# EAGLE board FPD EMC01 (EAGLE 6.6.0)

Size 160 x 100 mm. Coordinates in mm from the lower left corner, seen from the top.
Outline: 0,0 160,0 160,100 0,100 0,0
Copper layers (1*16): Top 0.035mm / dielectric 1.5mm / Bottom 0.035mm
Design rules "default": minimum track width 10mil, minimum drill 24mil, track to track 8mil, track to pad 8mil, pad to pad 8mil, via to via 8mil, smd to smd 8mil, copper to edge 40mil, drill to drill 8mil, minimum pad ring 10mil, minimum via ring 8mil, stop-mask expansion 4mil, vias tented up to drill 0mil, thermal gap 10mil

## Footprints (pad centres in the part's own frame; a part is rotated, then mirrored left to right if it is on the bottom)
CAPC2012X145AN = smd 1.15 x 1.45: 1 -0.9,0; 2 0.9,0
C805 = smd 1.3 x 1.5: 1 -0.95,0; 2 0.95,0
PANASONIC_D = smd 3 x 1.4: + 2.4,0; - -2.4,0
SMA = smd 2 x 2: A 2,0; C -2,0
MINISMDC = smd 1.676 x 3.15: P$1 -2.286,0; P$2 2.489,0
PHOENIX-5MM-2POS = drill 1.4 long: P$1 -2.5,0; P$2 2.5,0
USB-MICROB-PTH = smd 0.4 x 1.35: D+ 0,1.905; D- -0.65,1.905; GND 1.3,1.905; ID 0.65,1.905; VBUS -1.3,1.905 | drill 0.5 pad 0.6: GND1 -3.5,-0.795; GND3 3.5,-0.795 | smd 7.89 x 1.55: GND2 0,-0.795 | drill 0.55 pad 0.95 offset: GND4 -2.5,1.905; GND5 2.5,1.905
5566-6 = drill 1.4 square: 1 4.2,-2.75; 2 0,-2.75; 3 -4.2,-2.75; 4 4.2,2.75; 5 0,2.75; 6 -4.2,2.75
JST_B4B-PH_HEADER = drill 0.8 long: P1 2.98,0.048; P2 0.98,0.048; P3 -1.02,0.048; P4 -3.02,0.048
2X13SMD = smd 1.016 x 3.302: 1 -1.27,-3.81; 2 -1.27,1.27; 3 1.27,-3.81; 4 1.27,1.27; 5 3.81,-3.81; 6 3.81,1.27; 7 6.35,-3.81; 8 6.35,1.27; 9 8.89,-3.81; 10 8.89,1.27; 11 11.43,-3.81; 12 11.43,1.27; 13 13.97,-3.81; 14 13.97,1.27; 15 16.51,-3.81; 16 16.51,1.27; 17 19.05,-3.81; 18 19.05,1.27; 19 21.59,-3.81; 20 21.59,1.27; 21 24.13,-3.81; 22 24.13,1.27; 23 26.67,-3.81; 24 26.67,1.27; 25 29.21,-3.81; 26 29.21,1.27
JP3Q = drill 0.914 octagon: 1 -2.54,-1.27; 2 -2.54,1.27; 3 0,-1.27; 4 0,1.27; 5 2.54,-1.27; 6 2.54,1.27
1X02SMD = smd 1.016 x 3.302: 1 -1.27,1.27; 2 1.27,-1.27
MOLEX-1X4 = drill 1.016 pad 1.88 square: 1 0,0 | drill 1.016 pad 1.88: 2 2.54,0; 3 5.08,0; 4 7.62,0
JST_B3B-PH_HEADER = drill 0.8 long: P1 2.027,0.048; P2 0.028,0.048; P3 -1.972,0.048
1X02 = drill 1.016 pad 1.88: 1 0,0; 2 2.54,0
SDR1006 = smd 10.008 x 3.607: P$1 0,3.048; P$2 0,-3.353
CHIP-LED0805 = smd 1.2 x 1.2: A 0,-1.05; C 0,1.05
SJ_3_CONNECTED = smd 0.635 x 1.27: 1 -0.889,0; 2 0,0; 3 0.889,0
TO220V = drill 1.016 long: 1 -2.54,0; 2 0,0; 3 2.54,0
SOT95P280X135-3N = smd 1.4 x 0.65: 1 -1.15,0.95; 2 -1.15,-0.95; 3 1.15,0
CTS406 = smd 1.9 x 1.4: 1 -2.2,-1.2; 2 2.2,-1.2; 3 2.2,1.2; 4 -2.2,1.2
R0805 = smd 1.1 x 1.4: 1 -1,0; 2 1,0
SJ = smd 1.168 x 1.6: 1 -0.762,0; 2 0.762,0
EVQ-Q2 = smd 3.2 x 1.2: A -3.4,-2; A' 3.4,-2; B -3.4,2; B' 3.4,2
TSOT6 = smd 0.69 x 1: 1 -1,-1.4; 2 -0.05,-1.4; 3 0.9,-1.4; 4 0.9,1.2; 5 -0.05,1.2; 6 -1,1.2
TSSOP-24 = smd 0.45 x 1.65: 1 -3.6,-3.1; 2 -2.95,-3.1; 3 -2.3,-3.1; 4 -1.65,-3.1; 5 -1,-3.1; 6 -0.35,-3.1; 7 0.3,-3.1; 8 0.95,-3.1; 9 1.6,-3.1; 10 2.25,-3.1; 11 2.9,-3.1; 12 3.55,-3.1; 13 3.55,3; 14 2.9,3; 15 2.25,3; 16 1.6,3; 17 0.95,3; 18 0.3,3; 19 -0.35,3; 20 -1,3; 21 -1.65,3; 22 -2.3,3; 23 -2.95,3; 24 -3.6,3 | smd 4.32 x 3: PAD -0.025,-0.05
SOT23-6 = smd 0.6 x 0.9: 1 -0.95,-1.15; 2 0,-1.15; 3 0.95,-1.15; 4 0.95,1.15; 5 0,1.15; 6 -0.95,1.15
SOT23C = smd 1 x 1.4: 1 -0.95,-1.1; 2 0.95,-1.1; 3 0,1.1
TSSOP14 = smd 0.35 x 1.6: 1 -2,-2.9; 2 -1.35,-2.9; 3 -0.7,-2.9; 4 -0.05,-2.9; 5 0.6,-2.9; 6 1.25,-2.9; 7 1.9,-2.9; 8 1.9,2.7; 9 1.25,2.7; 10 0.6,2.7; 11 -0.05,2.7; 12 -0.7,2.7; 13 -1.35,2.7; 14 -2,2.7
QFP80P1600X1600X120-64N = smd 1.473 x 0.508: 1 -7.62,5.994; 2 -7.62,5.207; 3 -7.62,4.394; 4 -7.62,3.607; 5 -7.62,2.794; 6 -7.62,2.007; 7 -7.62,1.194; 8 -7.62,0.406; 9 -7.62,-0.406; 10 -7.62,-1.194; 11 -7.62,-2.007; 12 -7.62,-2.794; 13 -7.62,-3.607; 14 -7.62,-4.394; 15 -7.62,-5.207; 16 -7.62,-5.994; 33 7.62,-5.994; 34 7.62,-5.207; 35 7.62,-4.394; 36 7.62,-3.607; 37 7.62,-2.794; 38 7.62,-2.007; 39 7.62,-1.194; 40 7.62,-0.406; 41 7.62,0.406; 42 7.62,1.194; 43 7.62,2.007; 44 7.62,2.794; 45 7.62,3.607; 46 7.62,4.394; 47 7.62,5.207; 48 7.62,5.994 | smd 0.508 x 1.473: 17 -5.994,-7.62; 18 -5.207,-7.62; 19 -4.394,-7.62; 20 -3.607,-7.62; 21 -2.794,-7.62; 22 -2.007,-7.62; 23 -1.194,-7.62; 24 -0.406,-7.62; 25 0.406,-7.62; 26 1.194,-7.62; 27 2.007,-7.62; 28 2.794,-7.62; 29 3.607,-7.62; 30 4.394,-7.62; 31 5.207,-7.62; 32 5.994,-7.62; 49 5.994,7.62; 50 5.207,7.62; 51 4.394,7.62; 52 3.607,7.62; 53 2.794,7.62; 54 2.007,7.62; 55 1.194,7.62; 56 0.406,7.62; 57 -0.406,7.62; 58 -1.194,7.62; 59 -2.007,7.62; 60 -2.794,7.62; 61 -3.607,7.62; 62 -4.394,7.62; 63 -5.207,7.62; 64 -5.994,7.62
MSOP10 = smd 0.3 x 1.4: 1 -1,-2.2; 2 -0.5,-2.2; 3 0,-2.2; 4 0.5,-2.2; 5 1,-2.2; 6 1,2.2; 7 0.5,2.2; 8 0,2.2; 9 -0.5,2.2; 10 -1,2.2
FH12-15S-0.5SH = smd 0.3 x 1.3: 1 -3.5,3.25; 2 -3,3.25; 3 -2.5,3.25; 4 -2,3.25; 5 -1.5,3.25; 6 -1,3.25; 7 -0.5,3.25; 8 0,3.25; 9 0.5,3.25; 10 1,3.25; 11 1.5,3.25; 12 2,3.25; 13 2.5,3.25; 14 3,3.25; 15 3.5,3.25

## Placement (x,y rotation side)
C1  22uF  [CAPC2012X145AN]  -30.48,81.28 0 top  (outside the outline)
C2  0.22uF  [CAPC2012X145AN]  -57.15,67.31 0 top  (outside the outline)
C3  [C805]  -102.87,-3.81 0 top  (outside the outline)
C4  0.1uF  [CAPC2012X145AN]  -93.98,67.31 0 top  (outside the outline)
C5  0.1uF  [CAPC2012X145AN]  -17.78,74.93 0 top  (outside the outline)
C6  100uF  [PANASONIC_D]  -58.42,60.96 0 top  (outside the outline)
C7  100uF  [PANASONIC_D]  -67.31,60.96 0 top  (outside the outline)
C8  0.22uF  [CAPC2012X145AN]  -64.77,67.31 0 top  (outside the outline)
C9  10uF  [CAPC2012X145AN]  -36.83,81.28 0 top  (outside the outline)
C10  10uF  [CAPC2012X145AN]  -43.18,81.28 0 top  (outside the outline)
C11  [C805]  -102.87,-7.62 0 top  (outside the outline)
C12  1uF  [CAPC2012X145AN]  -41.91,93.98 0 top  (outside the outline)
C13  [C805]  -102.87,-11.43 0 top  (outside the outline)
C14  [C805]  -102.87,-15.24 0 top  (outside the outline)
C15  10uF  [CAPC2012X145AN]  -49.53,81.28 0 top  (outside the outline)
C16  100uF  [PANASONIC_D]  -76.2,60.96 0 top  (outside the outline)
C17  0.1uF  [CAPC2012X145AN]  -24.13,74.93 0 top  (outside the outline)
C18  100uF  [PANASONIC_D]  -85.09,60.96 0 top  (outside the outline)
C19  0.22uF  [CAPC2012X145AN]  -72.39,67.31 0 top  (outside the outline)
C20  10uF  [CAPC2012X145AN]  -55.88,81.28 0 top  (outside the outline)
C21  0.1uF  [CAPC2012X145AN]  -30.48,74.93 0 top  (outside the outline)
C22  0.1uF  [CAPC2012X145AN]  -36.83,74.93 0 top  (outside the outline)
C24  0.22uF  [CAPC2012X145AN]  -80.01,67.31 0 top  (outside the outline)
C25  10uF  [CAPC2012X145AN]  -62.23,81.28 0 top  (outside the outline)
C26  0.1uF  [CAPC2012X145AN]  -43.18,74.93 0 top  (outside the outline)
C28  0.1uF  [CAPC2012X145AN]  -55.88,74.93 0 top  (outside the outline)
C32  10uF  [CAPC2012X145AN]  -74.93,81.28 0 top  (outside the outline)
C33  0.1uF  [CAPC2012X145AN]  -68.58,74.93 0 top  (outside the outline)
C34  [C805]  -102.87,-19.05 0 top  (outside the outline)
C35  0.1uF  [CAPC2012X145AN]  -74.93,74.93 0 top  (outside the outline)
C36  [C805]  -102.87,-22.86 0 top  (outside the outline)
C38  0.1uF  [CAPC2012X145AN]  -87.63,74.93 0 top  (outside the outline)
C39  0.1uF  [CAPC2012X145AN]  -93.98,74.93 0 top  (outside the outline)
C40  0.1uF  [CAPC2012X145AN]  -17.78,81.28 0 top  (outside the outline)
C42  [C805]  -102.87,-26.67 0 top  (outside the outline)
C43  0.1uF  [CAPC2012X145AN]  -123.19,-58.42 0 top  (outside the outline)
C44  1UF  [C805]  -123.19,-64.77 0 top  (outside the outline)
C45  100NF  [C805]  -123.19,-68.58 0 top  (outside the outline)
D1  [SMA]  -40.64,67.31 0 top  (outside the outline)
D2  [SMA]  -48.26,67.31 0 top  (outside the outline)
F1  [MINISMDC]  -26.67,67.31 0 top  (outside the outline)
J2  [PHOENIX-5MM-2POS]  -82.55,40.64 0 top  (outside the outline)
J3  USB-MICRO-PTH  [USB-MICROB-PTH]  -118.11,-41.91 0 top  (outside the outline)
J4  PCIE  [5566-6]  -54.61,7.62 0 top  (outside the outline)
JP1  MOT-Y  [JST_B4B-PH_HEADER]  -69.85,30.48 0 top  (outside the outline)
JP2  RPI_GPIO  [2X13SMD]  -121.92,-101.6 0 top  (outside the outline)
JP3  MOT-Z  [JST_B4B-PH_HEADER]  -81.28,30.48 0 top  (outside the outline)
JP4  ICSP  [JP3Q]  -77.47,6.35 0 top  (outside the outline)
JP5  BOOT  [1X02SMD]  -121.92,-111.76 0 top  (outside the outline)
JP6  HOTEND  [JST_B4B-PH_HEADER]  -22.86,41.91 0 top  (outside the outline)
JP7  I2C  [MOLEX-1X4]  -34.29,41.91 0 top  (outside the outline)
JP8  Y-STOP  [JST_B3B-PH_HEADER]  -40.64,30.48 0 top  (outside the outline)
JP9  MOT-X  [JST_B4B-PH_HEADER]  -45.72,41.91 0 top  (outside the outline)
JP10  Z-STOP  [JST_B3B-PH_HEADER]  -49.53,30.48 0 top  (outside the outline)
JP12  X-STOP  [JST_B3B-PH_HEADER]  -58.42,30.48 0 top  (outside the outline)
JP15  B-THERM  [1X02]  -21.59,60.96 0 top  (outside the outline)
JP16  E-THERM  [1X02]  -31.75,60.96 0 top  (outside the outline)
JP17  FAN  [1X02]  -38.1,60.96 0 top  (outside the outline)
L1  47uH  [SDR1006]  -67.31,7.62 0 top  (outside the outline)
LED1  PWR  [CHIP-LED0805]  -34.29,67.31 0 top  (outside the outline)
MS-X  [SJ_3_CONNECTED]  -22.86,97.79 0 top  (outside the outline)
MS-Y  [SJ_3_CONNECTED]  -26.67,97.79 0 top  (outside the outline)
MS-Z  [SJ_3_CONNECTED]  -30.48,97.79 0 top  (outside the outline)
Q1  RFP30N06LE  [TO220V]  -57.15,40.64 0 top  (outside the outline)
Q2  RFP30N06LE  [TO220V]  -71.12,40.64 0 top  (outside the outline)
Q3  RFP30N06LE  [SOT95P280X135-3N]  -52.07,60.96 0 top  (outside the outline)
Q4  [CTS406]  -101.6,5.08 0 top  (outside the outline)
R1  330  [R0805]  -46.99,93.98 0 top  (outside the outline)
R2  10k  [R0805]  -82.55,93.98 0 top  (outside the outline)
R3  100k  [R0805]  -81.28,81.28 0 top  (outside the outline)
R4  100k  [R0805]  -87.63,81.28 0 top  (outside the outline)
R5  100K  [R0805]  -88.9,93.98 0 top  (outside the outline)
R6  100k  [R0805]  -93.98,81.28 0 top  (outside the outline)
R7  22  [R0805]  -123.19,-78.74 0 top  (outside the outline)
R8  22  [R0805]  -123.19,-85.09 0 top  (outside the outline)
R9  4.7k  [R0805]  -26.67,93.98 0 top  (outside the outline)
R10  4.7k  [R0805]  -31.75,93.98 0 top  (outside the outline)
R11  100  [R0805]  -52.07,93.98 0 top  (outside the outline)
R12  100K  [R0805]  -123.19,-118.11 0 top  (outside the outline)
R14  100k  [R0805]  -16.51,87.63 0 top  (outside the outline)
R16  0.11  [R0805]  -66.04,87.63 0 top  (outside the outline)
R17  0.11  [R0805]  -71.12,87.63 0 top  (outside the outline)
R18  0.11  [R0805]  -76.2,87.63 0 top  (outside the outline)
R19  0.11  [R0805]  -81.28,87.63 0 top  (outside the outline)
R20  10k  [R0805]  -57.15,93.98 0 top  (outside the outline)
R21  100k  [R0805]  -22.86,87.63 0 top  (outside the outline)
R22  100k  [R0805]  -29.21,87.63 0 top  (outside the outline)
R24  0.11  [R0805]  -86.36,87.63 0 top  (outside the outline)
R25  0.11  [R0805]  -91.44,87.63 0 top  (outside the outline)
R26  10k  [R0805]  -62.23,93.98 0 top  (outside the outline)
R27  100k  [R0805]  -35.56,87.63 0 top  (outside the outline)
R28  100k  [R0805]  -41.91,87.63 0 top  (outside the outline)
R35  100k  [R0805]  -60.96,87.63 0 top  (outside the outline)
R36  100  [R0805]  -72.39,93.98 0 top  (outside the outline)
R37  5.6k  [R0805]  -36.83,93.98 0 top  (outside the outline)
R38  1k  [R0805]  -77.47,93.98 0 top  (outside the outline)
SJ1  [SJ]  -123.19,-74.93 0 top  (outside the outline)
SW1  SPST_TACT-EVQQ2  [EVQ-Q2]  -27.94,30.48 0 top  (outside the outline)
U1  LM2841  [TSOT6]  -77.47,49.53 0 top  (outside the outline)
U2  A4982  [TSSOP-24]  -29.21,52.07 0 top  (outside the outline)
U3  A4982  [TSSOP-24]  -41.91,52.07 0 top  (outside the outline)
U4  A4982  [TSSOP-24]  -54.61,52.07 0 top  (outside the outline)
U6  PRTR5V0U4D  [SOT23-6]  -115.57,-49.53 0 top  (outside the outline)
U7  AP7313  [SOT23C]  -86.36,50.8 0 top  (outside the outline)
U8  TXB0104  [TSSOP14]  -17.78,52.07 0 top  (outside the outline)
U9  AT90USB1287-AU  [QFP80P1600X1600X120-64N]  -115.57,-15.24 0 top  (outside the outline)
U10  MCP4728  [MSOP10]  -121.92,-50.8 0 top  (outside the outline)
X1  15-Pin FFC For Cam  [FH12-15S-0.5SH]  -118.11,-93.98 0 top  (outside the outline)

## Library data of the parts
C1 C2 C4 C5 C8-C10 C12 C15 C17 C19-C22 C24-C26 C28 C32 C33 C35 C38-C40 C43 = ipc-7351-capacitor
C3 C11 C13 C14 C34 C36 C42 C44 C45 = dp_devices
C6 C7 C16 C18 = rcl
D1 D2 F1 J2 J3 JP4 L1 MS-X MS-Y MS-Z U1-U4 U6-U8 U10 = printrbot
J4 = printrbot; MPN: 95566-61002; OC_FARNELL: unknown; OC_NEWARK: 22K8620
JP1 JP3 JP6 JP8-JP10 JP12 = SRG
JP2 JP5 = pinhead-2
JP7 JP15-JP17 Q1 Q2 = SparkFun
LED1 = led
Q3 = ipc-7351-transistor
Q4 = adafruit; OC_FARNELL: unknown; OC_NEWARK: unknown
R1-R6 R11 R12 R14 R16-R22 R24-R28 R35 R36 SW1 = adafruit
R7-R10 = adafruit; TOLERANCE: 1%
R37 R38 = adafruit; TOLERANCE: 0.1%
SJ1 = jumper
U9 = Atmel_By_element14_Batch_1-00; DESCRIPTION: MCU; MPN: AT90USB1287-AU; OC_FARNELL: 1748496; OC_NEWARK: 26R5676; PACKAGE: QFP-64; SUPPLIER: Atmel
X1 = con-hirose; OC_FARNELL: 1324545; OC_NEWARK: unknown

## Nets
12V: C4.1 C6.+ C7.+ C12.1 C16.+ C18.+ C21.1 C26.1 C28.1 C33.1 C35.1 J2.P$1 J4.1 J4.2 J4.3 JP6.P3 JP6.P4 JP17.1 U1.4 U1.5 U2.16 U2.21 U3.16 U3.21 U4.16 U4.21
!HOTBED: R11.1 R35.1
!HOTEND: R6.1 R36.1
!PWM-FAN: Q3.1 R14.1
!RESET: JP4.2
!X-ENABLE: R3.2 U2.23
!Y-ENABLE: R21.2 U3.23
!Z-ENABLE: R27.2 U4.23
+3V3 [power]: C32.1 U7.2 U8.1 U8.8
+5V [power]: C1.1 C13.2 C14.2 C15.2 C20.2 C25.2 C34.2 C36.2 C43.2 JP4.5 JP7.4 JP8.P2 JP10.P2 JP12.P2 L1.P$2 MS-X.2 MS-Y.2 MS-Z.2 R1.2 R3.1 R4.1 R5.2 R9.2 R10.2 R12.2 R21.1 R22.1 R27.1 R28.1 R37.1 SJ1.2 U2.10 U3.10 U4.10 U7.1 U8.14 U9.21 U9.52 U9.64 U10.1 U10.4
A2: U9.59
A3: U9.58
ALF: JP5.2 R12.1 U9.43
AREF: C42.2 U9.62
B-THERM: C9.2 JP15.1 R10.1 U9.61
D+: R8.1 U9.5
D-: R7.1 U9.4
E-THERM: C10.2 JP16.1 R9.1
F-THERM: U9.60
GND [power]: C1.2 C3.2 C6.- C7.- C8.1 C9.1 C10.1 C11.2 C12.2 C13.1 C14.1 C15.1 C16.- C18.- C19.1 C20.1 C24.1 C25.1 C28.2 C32.2 C33.2 C34.1 C35.2 C36.1 C38.2 C39.2 C40.2 C42.1 C43.1 C44.2 C45.1 D1.A D2.A J3.GND J3.GND1 J3.GND2 J3.GND3 J3.GND4 J3.GND5 J4.4 J4.5 J4.6 JP4.1 JP5.1 JP7.3 JP8.P3 JP10.P3 JP12.P3 JP15.2 JP16.2 LED1.C Q1.3 Q2.3 Q3.2 R2.2 R6.2 R14.2 R16.2 R17.2 R18.2 R19.2 R20.2 R24.2 R25.2 R26.2 R35.2 R38.2 SW1.A SW1.A' U1.2 U2.13 U2.24 U2.PAD U3.13 U3.24 U3.PAD U4.13 U4.24 U4.PAD U6.2 U7.3 U8.7 U9.6 U9.22 U9.53 U9.63 U10.10
HOTBED: U9.39
HOTBED-GND [power]: J2.P$2 Q2.2
HOTEND: U9.40
HOTEND-GND [power]: JP6.P1 JP6.P2 Q1.2
MCU_DN: J3.D- R7.2 U6.3
MCU_DP: J3.D+ R8.2 U6.1
MISO: JP4.6 U8.13 U9.13
MOSI: JP4.3 U8.11 U9.12
N$1: LED1.A R1.1
N$2: D2.C F1.P$2 Q3.3
N$5: F1.P$1 JP17.2
N$7: Q2.1 R11.2
N$10: JP9.P3 U2.18
N$11: C5.2 U2.1
N$12: C5.1 U2.2
N$13: R2.1 U2.8
N$14: R17.1 U2.17
N$15: R18.1 U2.20
N$16: C4.2 U2.3
N$17: JP9.P4 U2.15
N$19: C8.2 U2.4
N$20: JP9.P2 U2.19
N$21: R4.2 U2.7 U2.9
N$22: R37.2 R38.1 U1.3
N$23: JP9.P1 U2.22
N$24: JP1.P2 U3.19
N$25: JP1.P1 U3.22
N$26: U3.15
N$27: MS-X.1 U2.5
N$28: MS-X.3 U2.6
N$29: C17.2 U3.1
N$30: C17.1 U3.2
N$31: U3.18
N$32: R19.1 U3.20
N$34: R20.1 U3.8
N$35: C19.2 U3.4
N$36: R22.2 U3.7 U3.9
N$37: C21.2 U3.3
N$38: R16.1 U3.17
N$39: U4.15
N$40: U4.18
N$41: JP3.P2 U4.19
N$42: MS-Y.1 U3.5
N$43: MS-Y.3 U3.6
N$44: C22.2 U4.1
N$45: C22.1 U4.2
N$46: R24.1 U4.17
N$47: R25.1 U4.20
N$49: R26.1 U4.8
N$50: C24.2 U4.4
N$51: R28.2 U4.7 U4.9
N$52: C26.2 U4.3
N$53: JP3.P1 U4.22
N$57: MS-Z.1 U4.5
N$58: MS-Z.3 U4.6
N$71: Q1.1 R36.2
N$75: C2.1 D1.C L1.P$1 U1.6
N$77: C2.2 U1.1
PA6: U9.45
PA7: U9.44
PB5: U9.15
PB6: U9.16
PC0: U9.35
PC1: U9.36
PC2: U9.37
PC3: U9.38
PD2-RX1: U9.27
PD3-TX1: U9.28
PD4: U9.29
PD5: U9.30
PD6: U9.31
PD7: U9.32
PE0: U9.33
PE1: U9.34
PE5: U9.19
PWM-FAN: U9.41
RESET: R5.1 SW1.B SW1.B' U9.20
SCL [power]: JP7.1 U9.25 U10.2
SCLK: JP4.4 U8.12
SDA [power]: JP7.2 U9.26 U10.3
SDCD: U9.17
SDCLK: U8.3
SDCS: U8.10 U9.10
SDCSH: U8.5
SDDI: U8.4
SDDO: U8.2
SDLK: U9.11
TCK: U9.57
TDI: U9.54
TDO: U9.55
TMS: U9.56
UVCC: U9.3
VBUS: C45.2 J3.VBUS SJ1.1 U6.5 U9.8
VCAP: C44.1 U9.7
VREF_E: U10.6
VREF_X: C39.1 U2.12 U10.9
VREF_Y: C38.1 U3.12 U10.8
VREF_Z: C40.1 U4.12 U10.7
X-DIR: U2.14 U9.50
X-ENABLE: U9.1
X-STEP: U2.11 U9.51
X-STOP: JP12.P1 U9.9
XTAL1: C3.1 Q4.3 U9.24
XTAL2: C11.1 Q4.1 U9.23
Y-DIR: U3.14 U9.48
Y-ENABLE: U9.2
Y-STEP: U3.11 U9.49
Y-STOP: JP8.P1 U9.14
Z-DIR: U4.14 U9.46
Z-ENABLE: U9.42
Z-STEP: U4.11 U9.47
Z-STOP: JP10.P1 U9.18

## Tracks (layer width: path | path; a pad name or v marks a point on that pad's centre or on a via)
12V  (25 unrouted)
!HOTBED  (1 unrouted)
!HOTEND  (1 unrouted)
!PWM-FAN  (1 unrouted)
!X-ENABLE  (1 unrouted)
!Y-ENABLE  (1 unrouted)
!Z-ENABLE  (1 unrouted)
+3V3  (3 unrouted)
+5V  (40 unrouted)
ALF  (2 unrouted)
AREF  (1 unrouted)
B-THERM  (3 unrouted)
D+  (1 unrouted)
D-  (1 unrouted)
E-THERM  (2 unrouted)
GND  (86 unrouted)
HOTBED-GND  (1 unrouted)
HOTEND-GND  (2 unrouted)
MCU_DN  (2 unrouted)
MCU_DP  (2 unrouted)
MISO  (2 unrouted)
MOSI  (2 unrouted)
N$1  (1 unrouted)
N$2  (2 unrouted)
N$5  (1 unrouted)
N$7  (1 unrouted)
N$10  (1 unrouted)
N$11  (1 unrouted)
N$12  (1 unrouted)
N$13  (1 unrouted)
N$14  (1 unrouted)
N$15  (1 unrouted)
N$16  (1 unrouted)
N$17  (1 unrouted)
N$19  (1 unrouted)
N$20  (1 unrouted)
N$21  (2 unrouted)
N$22  (2 unrouted)
N$23  (1 unrouted)
N$24  (1 unrouted)
N$25  (1 unrouted)
N$27  (1 unrouted)
N$28  (1 unrouted)
N$29  (1 unrouted)
N$30  (1 unrouted)
N$32  (1 unrouted)
N$34  (1 unrouted)
N$35  (1 unrouted)
N$36  (2 unrouted)
N$37  (1 unrouted)
N$38  (1 unrouted)
N$41  (1 unrouted)
N$42  (1 unrouted)
N$43  (1 unrouted)
N$44  (1 unrouted)
N$45  (1 unrouted)
N$46  (1 unrouted)
N$47  (1 unrouted)
N$49  (1 unrouted)
N$50  (1 unrouted)
N$51  (2 unrouted)
N$52  (1 unrouted)
N$53  (1 unrouted)
N$57  (1 unrouted)
N$58  (1 unrouted)
N$71  (1 unrouted)
N$75  (3 unrouted)
N$77  (1 unrouted)
RESET  (3 unrouted)
SCL  (2 unrouted)
SCLK  (1 unrouted)
SDA  (2 unrouted)
SDCS  (1 unrouted)
VBUS  (4 unrouted)
VCAP  (1 unrouted)
VREF_X  (2 unrouted)
VREF_Y  (2 unrouted)
VREF_Z  (2 unrouted)
X-DIR  (1 unrouted)
X-STEP  (1 unrouted)
X-STOP  (1 unrouted)
XTAL1  (2 unrouted)
XTAL2  (2 unrouted)
Y-DIR  (1 unrouted)
Y-STEP  (1 unrouted)
Y-STOP  (1 unrouted)
Z-DIR  (1 unrouted)
Z-STEP  (1 unrouted)
Z-STOP  (1 unrouted)